# Altium PCB ADS1234.PcbDoc
Units mm, origin at the board's own origin, x right, y up, seen from the top; angles counter-clockwise.
Board outline 30 x 38 mm, 2 copper layers (Top Layer, Bottom Layer); 23 components, 29 nets, 87 pads, 10 vias.
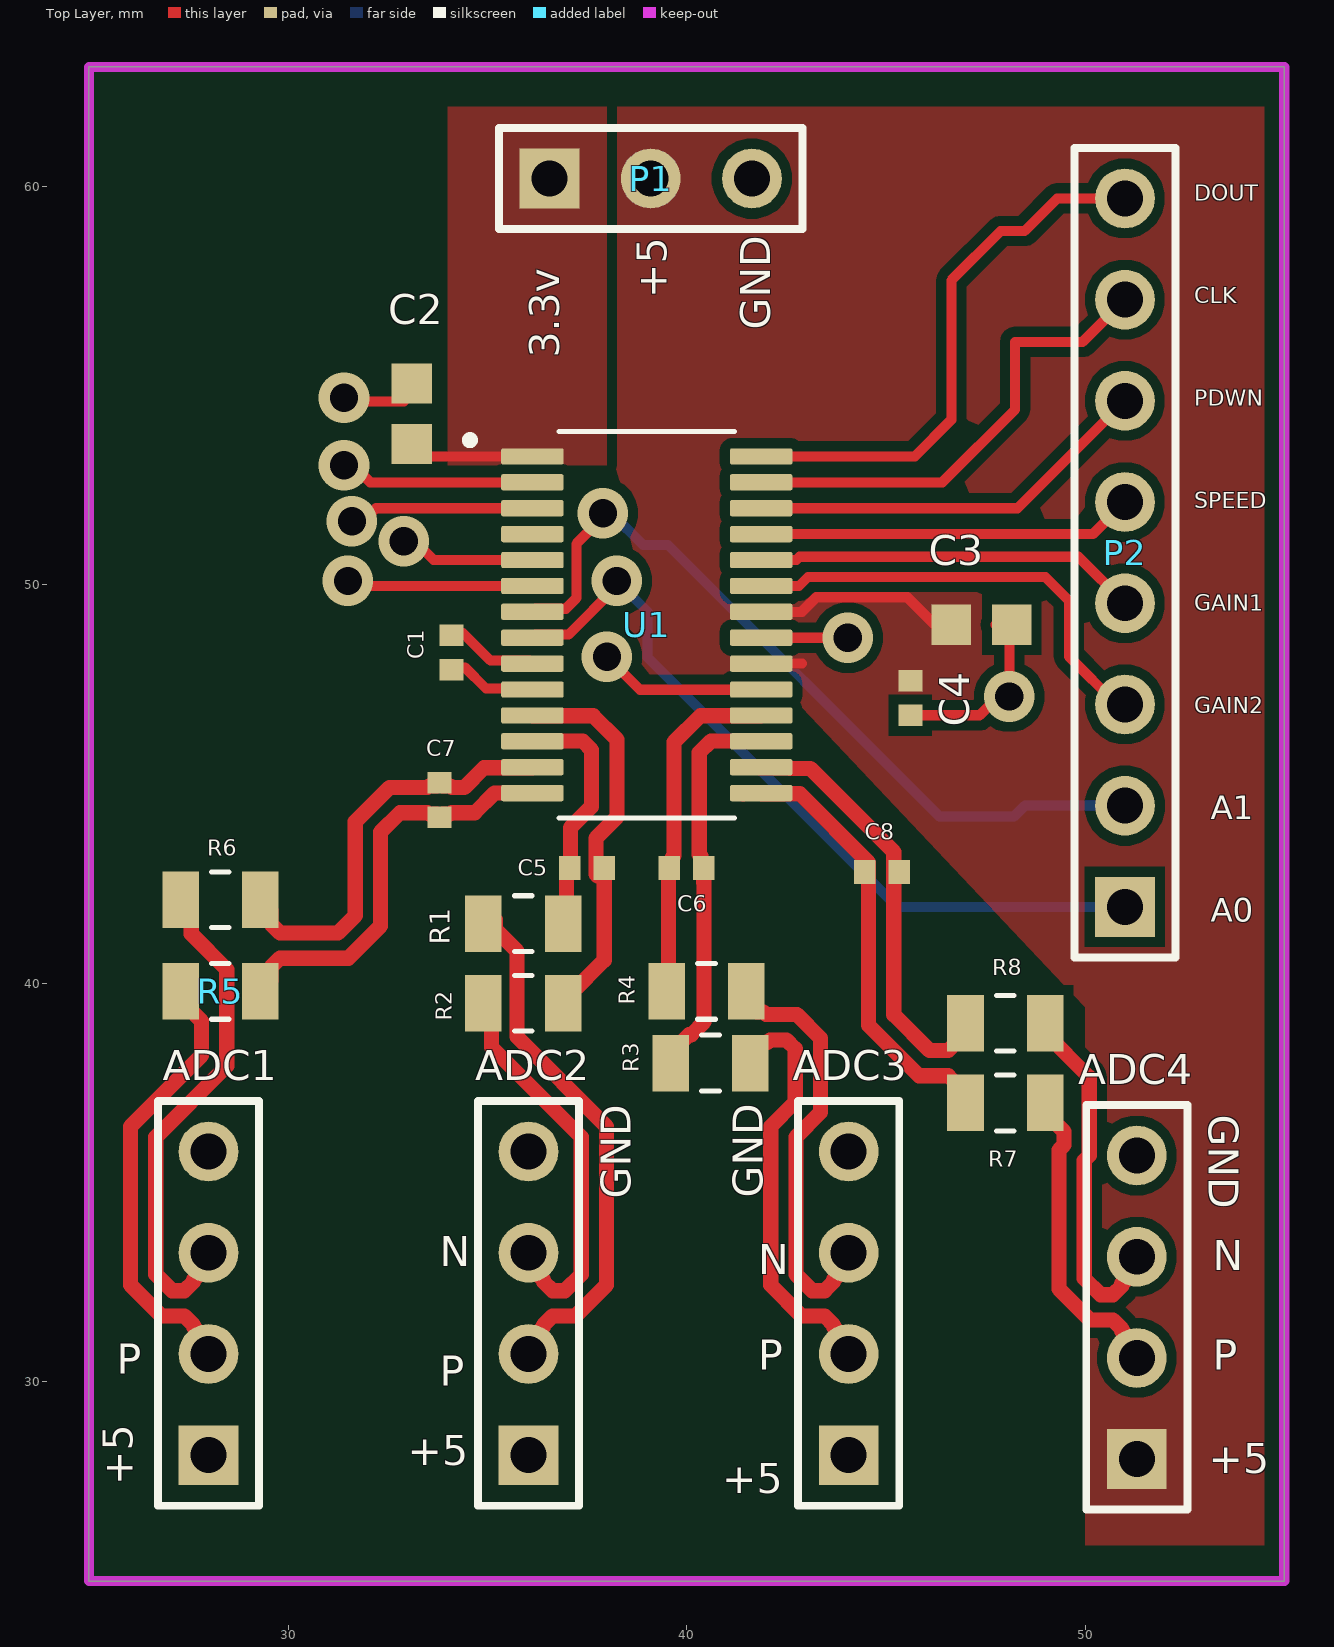
[diagram p0: Top Layer view]
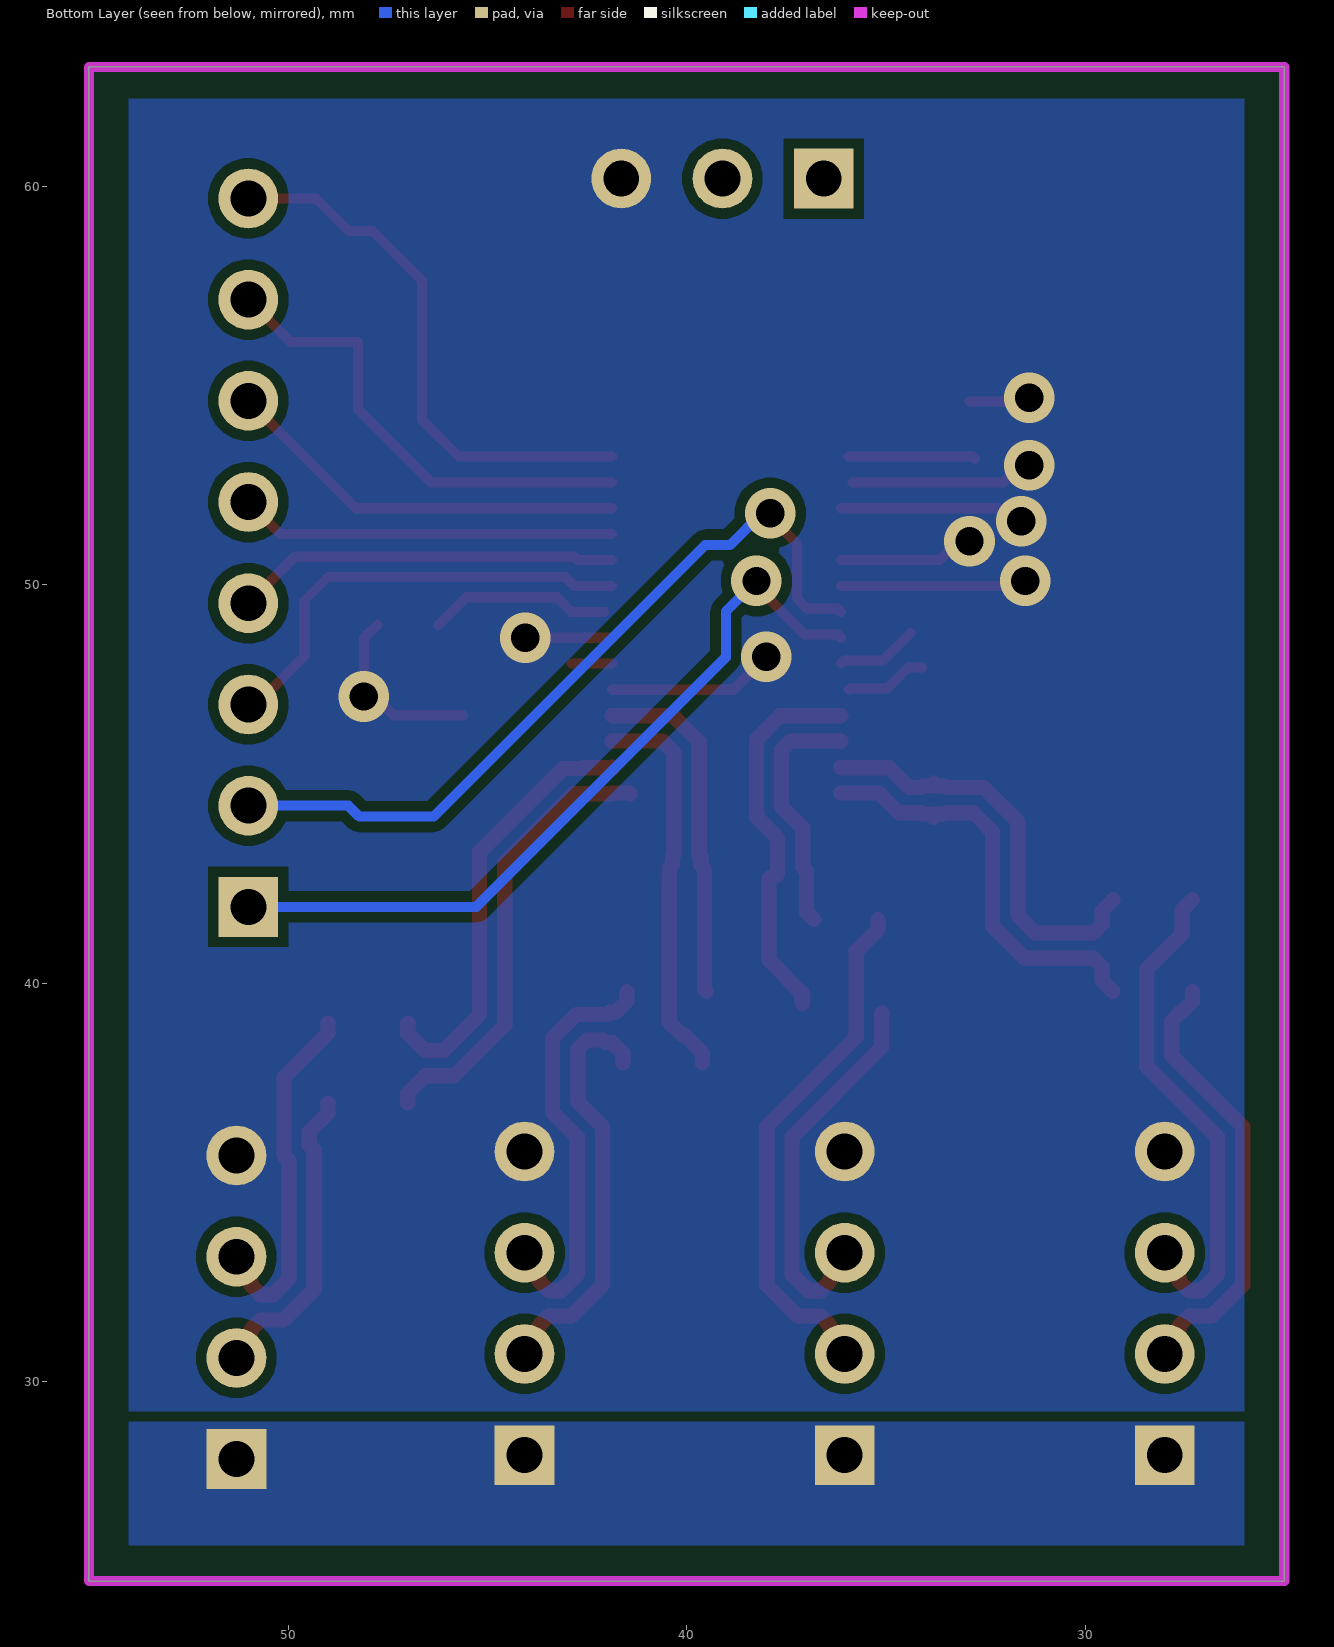
[diagram p1: Bottom Layer view, seen from below]
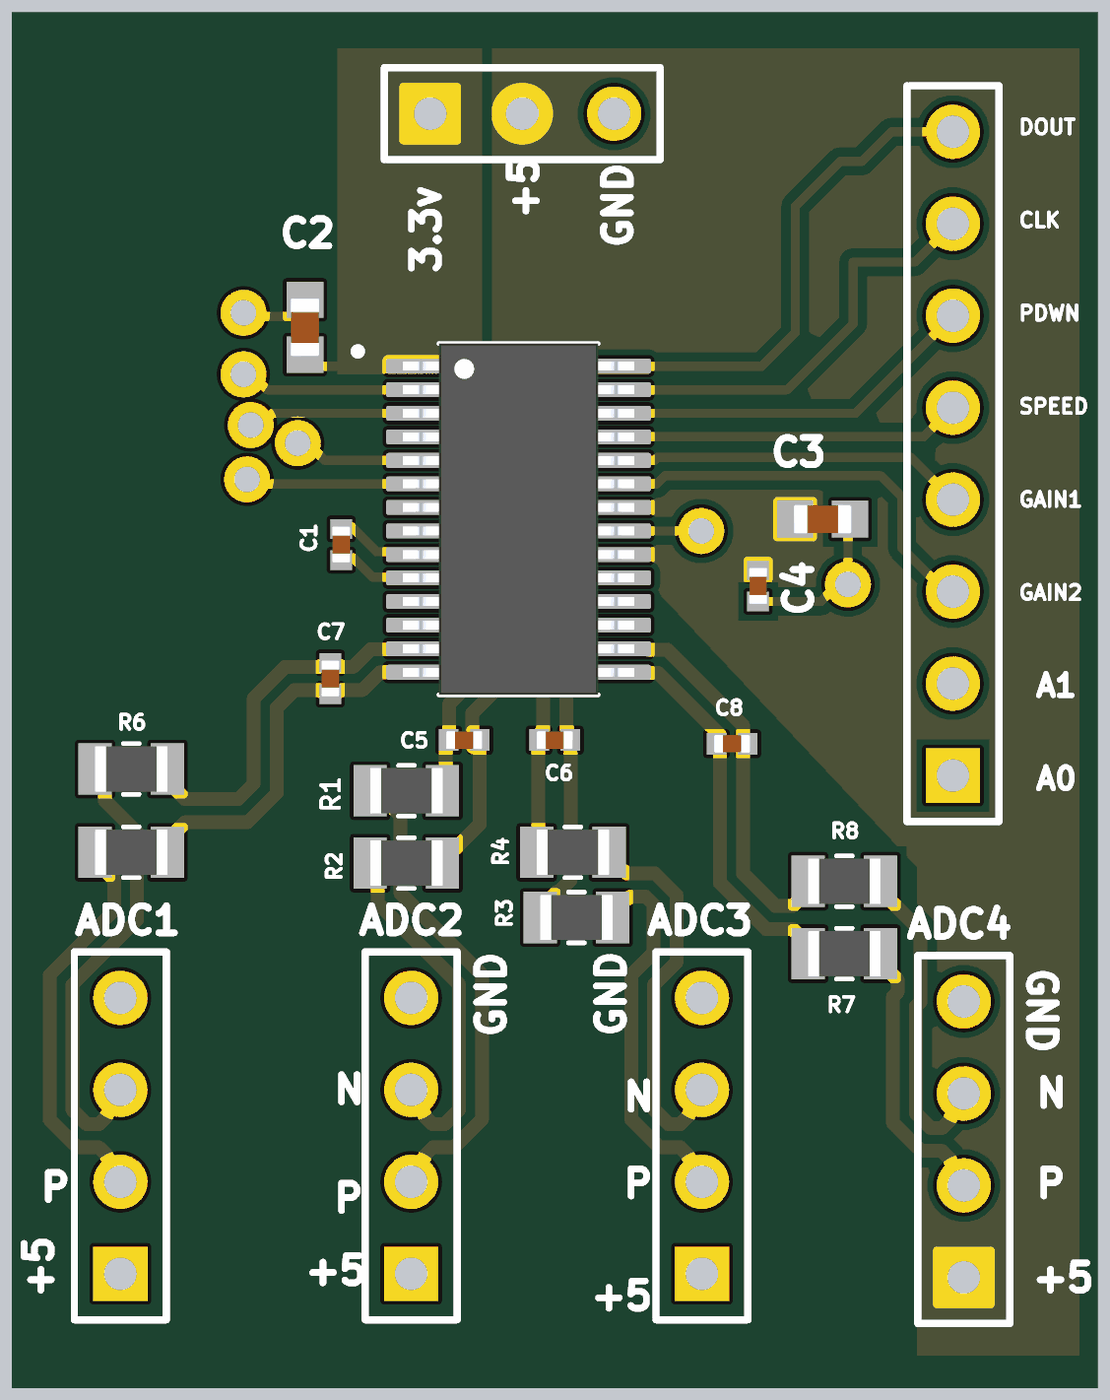
[diagram p2: 3D render of the assembled board from above, using the file's embedded part models]

## Layer stack, top to bottom
Top Solder: solder mask 0.0102, Solder Resist, Dk 3.5
Top Layer: signal copper 0.0356
Dielectric 1: dielectric 0.32, FR-4, Dk 4.8
Bottom Layer: signal copper 0.0356
Bottom Solder: solder mask 0.0102, Solder Resist, Dk 3.5

## Board outline
25,25 55,25 55,63 25,63

## Design rules (kind name [scope] priority, off if disabled: settings)
Clearance [All] p1: gap=0.254 ignorepadtopadclearanceinfootprint=FALSE except(0: Arc-Hole Track-Hole SMDPad-Hole THPad-Hole Via-Hole Fill-Hole Poly-Hole Region-Hole Text-Hole; 0.19: Arc-SMDPad Track-SMDPad SMDPad-SMDPad)
DiffPairsRouting [All] p1: maxlimit=0.254 minlimit=0.254 mostfreqgap=0.254 toplayer_minwidth=0.381 toplayer_maxwidth=0.381 toplayer_prefwidth=0.381 bottomlayer_minwidth=0.381 bottomlayer_maxwidth=0.381 bottomlayer_prefwidth=0.381 maxuncoupledlength=12.7
MinimumSolderMaskSliver [All] p1: minsoldermaskwidth=0.03
PlaneConnect [All] p1: planeconnectstyle=Direct reliefexpansion=0.508 reliefentries=4 reliefconductorwidth=0.254 reliefairgap=0.254
PolygonConnect [All] p1: connectstyle=Direct reliefconductorwidth=0.254 reliefentries=4 polygonreliefangle="90 Angle" airgapwidth=0.254
RoutingVias [All] p1: holewidth=0.711 width=1.27 viastyle="Through Hole" minholewidth=0.711 minwidth=1.27 maxholewidth=0.711 maxwidth=1.27
SilkToSolderMaskClearance [IsPad] p1: minsilkscreentomaskgap=0.256 clearancetoexposedcopper=TRUE
SolderMaskExpansion [All] p1: expansion=0.102 istentingtop=FALSE
Width [All] p1: maxlimit=0.254 minlimit=0.254 preferedwidth=0.254
26 further rules are at their usual default settings.

## Classes and differential pairs
differential pair A4: +A4_P -A4_N
differential pair A3: +A3_P -A3_N
differential pair A2: +A2_P -A2_N
differential pair A1: +A1_P -A1_N
differential pair AIN4: +AIN4_P -AIN4_N
differential pair AIN3: +AIN3_P -AIN3_N
differential pair AIN2: +AIN2_P -AIN2_N
differential pair AIN1: +AIN1_P -AIN1_N

## Components (designator, comment, footprint, x,y, rotation, side; value= is the part's Value field where it differs from the comment)
ADC1 "Header 4" HDR1X4 28,28.16 r90 top
ADC2 "Header 4" HDR1X4 36.033,28.16 r90 top
ADC3 "Header 4" HDR1X4 44.067,28.16 r90 top
ADC4 "Header 4" HDR1X4 51.3,28.06 r90 top
C1 "100N" CAPC1005X55N 34.1,48.3 r90 top
C2 "2.2uF" CAPC1608X100N 33.1,54.3 r90 top
C3 "2.2uF" CAPC1608X100N 47.4,49 r0 top
C4 "100N" CAPC1005X55N 45.617,47.16 r270 top
C5 "100N" CAPC1005X55N 37.5,42.9 r0 top
C6 "100N" CAPC1005X55N 40,42.9 r180 top
C7 "100N" CAPC1005X55N 33.8,44.6 r90 top
C8 "100N" CAPC1005X55N 44.9,42.8 r0 top
P1 "Power Input Header" HDR1X3 36.56,60.2 r0 top
P2 "DATA/CONTROL HEADER" HDR1X8 51,41.92 r90 top
R1 "1K" RESC2012X50N 35.9,41.5 r0 top
R2 "1K" RESC2012X50N 35.9,39.5 r0 top
R3 "1K" RESC2012X50N 40.6,38 r180 top
R4 "1K" RESC2012X50N 40.5,39.8 r180 top
R5 "1K" RESC2012X50N 28.3,39.8 r0 top
R6 "1K" RESC2012X50N 28.3,42.1 r0 top
R7 "1K" RESC2012X50N 48,37 r180 top
R8 "1K" RESC2012X50N 48,39 r180 top
U1 "ADS1234IPWR" SOP65P640X120-28N 39,49 r0 top

## Footprints (in the part's own frame and the unit in brackets; to place one, negate y for a bottom-side part, rotate by r counter-clockwise, add the part's x,y. Pads: shape width x height; smd on the part's side, far side on the other; paste and mask are expansions set on the pad)
CAPC1005X55N [mm]
  rect 0.54x0.6 smd: 1(-0.432,0) 2(0.432,0)
  body extent -0.5,-0.25 0.5,0.25, height 0.55
CAPC1608X100N [mm]
  rect 1x1.02 smd: 1(-0.759,0) 2(0.759,0)
  body extent -0.8,-0.4 0.8,0.4, height 1
HDR1X3 [mm] "Connector; Header; 3 Position"
  rect 1.5x1.5 hole 0.9: 1(0,0)
  round 1.5 hole 0.9: 2(2.54,0) 3(5.08,0)
  silkscreen extent -1.27,-1.27 6.35,1.27
HDR1X4 [mm] "Connector; Header; 4 Position"
  rect 1.5x1.5 hole 0.9: 1(0,0)
  round 1.5 hole 0.9: 2(2.54,0) 3(5.08,0) 4(7.62,0)
  silkscreen extent -1.27,-1.27 8.89,1.27
HDR1X8 [mm] "Connector; Header; 8 Position"
  rect 1.5x1.5 hole 0.9: 1(0,0)
  round 1.5 hole 0.9: 2(2.54,0) 3(5.08,0) 4(7.62,0) 5(10.16,0) 6(12.7,0) 7(15.24,0) 8(17.78,0)
  silkscreen extent -1.27,-1.27 19.05,1.27
RESC2012X50N [mm]
  rect 0.92x1.42 smd: 1(-1,0) 2(1,0)
  silkscreen extent -0.22,-0.7 0.22,0.7, body extent -1,-0.62 1,0.63, height 0.5
SOP65P640X120-28N [mm]
  rrect25% 1.57x0.41 smd: 1(-2.87,4.225) 2(-2.87,3.575) 3(-2.87,2.925) 4(-2.87,2.275) 5(-2.87,1.625) 6(-2.87,0.975) 7(-2.87,0.325) 8(-2.87,-0.325) 9(-2.87,-0.975) 10(-2.87,-1.625) 11(-2.87,-2.275) 12(-2.87,-2.925) 13(-2.87,-3.575) 14(-2.87,-4.225) 15(2.87,-4.225) 16(2.87,-3.575) 17(2.87,-2.925) 18(2.87,-2.275) 19(2.87,-1.625) 20(2.87,-0.975) 21(2.87,-0.325) 22(2.87,0.325) 23(2.87,0.975) 24(2.87,1.625) 25(2.87,2.275) 26(2.87,2.925) 27(2.87,3.575) 28(2.87,4.225)
  silkscreen extent -4.54,-4.85 2.2,4.85, body extent -3.2,-4.85 3.2,4.85, height 1.2

## Part data
ADC1 ADC2 ADC3 ADC4: "Header, 4-Pin", LatestRevisionDate=17-Jul-2002, LatestRevisionNote="Re-released for DXP Platform.", Publisher="Altium Limited"
C1 C4 C5 C6 C7 C8: library part GRM155R71C104KA88D, "SMD Capacitor X7R_EIA_ with Capacitance: 0.10uF Tol. 10%. Rated Voltage: 16Vdc", Package="1005 Taiyo Yuden", MF=Murata, MP=GRM155R71C104KA88D, SnapEDA_Link=https://www.snapeda.com/parts/GRM155R71C104KA88D/Murata%20Electronics%20North%20America/view-part/4750/?ref=snap
C2 C3: library part GRM188R61H225ME11D, Package=None, Availability=Unavailable, MP=GRM188R61H225ME11D, Price=None
P1: library part "Header 3", "Header, 3-Pin", LatestRevisionDate=17-Jul-2002, LatestRevisionNote="Re-released for DXP Platform.", Publisher="Altium Limited"
P2: library part "Header 8", "Header, 8-Pin", LatestRevisionDate=17-Jul-2002, LatestRevisionNote="Re-released for DXP Platform.", Publisher="Altium Limited"
R1 R2 R3 R4 R5 R6 R7 R8: library part CRCW08051K00DHEAP, Package=None, Availability=Unavailable, MP=CRCW08051K00DHEAP, Price=None
U1: Package=None, Availability=Unavailable, MP=ADS1234IPWR, Price=None

## Via types
v1: diameter 1.27, hole 0.711, Top Layer to Bottom Layer, 10 vias

## Nets (pads, with @x,y where several pads share a name; then routed paths per layer and width w, separated by ;. In a path a pad name is that pad's centre, name@x,y a point inside that pad or via, vN(x,y) a via of type N, cw(c..) or ccw(c..) an arc to the next point about the centre after c; other vN are vias at no path point)
3.3V: C2.1 P1.1 U1.1 | length 3.2
  Top Layer w0.254: C2.1@32.759,53.168 32.816,53.225 U1.1@35.936,53.225
5V: ADC1.1 ADC2.1 ADC3.1 ADC4.1 C3.1 C4.1 P1.2 U1.20 U1.22 | length 5.6
  Top Layer w0.254: U1.20 42.89,48.025 ; U1.22@42.064,49.325 42.888,49.325 43.255,49.692 45.539,49.692 C3.1@46.241,48.99
A0: P2.1 U1.8 | length 19.6
  Top Layer w0.254: U1.8 36.208,48.753 37.035,48.753 38.248,49.966 v1(38.248,50.1)
  Bottom Layer w0.254: v1(38.248,50.1) 39.016,49.332 39.016,48.184 45.28,41.92 P2.1
A1: P2.2 U1.7 | length 20
  Top Layer w0.254: U1.7 36.208,49.403 36.966,49.403 37.232,49.669 37.232,50.319 37.232,51.031 37.9,51.699 v1(37.9,51.8)
  Bottom Layer w0.254: v1(37.9,51.8) 38.111,51.8 38.908,51.003 39.534,51.003 46.353,44.184 48.214,44.184 48.49,44.46 P2.2
A1_N: C5.1 R1.2 U1.12 | length 6.2
  Top Layer w0.381: U1.12 36.137,46.082 37.392,46.082 37.615,45.859 37.615,44.435 37.087,43.908 37.087,42.919 C5.1 36.989,42.821 36.989,41.789 R1.2@36.8,41.6
A1_P: C5.2 R2.2 U1.11 | length 9.5
  Top Layer w0.381: U1.11 36.137,46.717 37.655,46.717 38.25,46.122 38.25,44.172 37.722,43.644 37.722,42.738 C5.2@37.763,42.697 ; R2.2@37.1,39.5 37.1,39.75 37.932,40.582 C5.2@37.932,42.637
A2_N: C6.1 R3.2 U1.17 | length 9.9
  Top Layer w0.381: R3.2 39.6,38.25 40.059,38.709 40.118,38.709 40.438,39.03 40.438,42.527 40.432,42.533 C6.1 40.352,42.98 40.352,43.2 40.317,43.235 40.317,45.792 40.608,46.082 41.862,46.082 U1.17
A2_P: C6.2 R4.2 U1.18 | length 8.7
  Top Layer w0.381: R4.2 39.547,39.847 C6.2@39.547,42.821 ; C6.2 39.647,42.98 39.647,43.168 39.682,43.204 39.682,46.055 40.345,46.717 41.862,46.717 U1.18
A3_N: C7.1 R5.2 U1.14 | length 10.6
  Top Layer w0.381: R5.2 29.57,40.07 29.57,40.409 29.793,40.632 31.516,40.632 32.32,41.437 32.32,43.796 32.806,44.282 33.497,44.282 33.532,44.247 33.721,44.247 C7.1 33.88,44.247 34.068,44.247 34.104,44.282 34.684,44.282 35.177,44.775 U1.14
A3_P: C7.2 R6.2 U1.13 | length 10.6
  Top Layer w0.381: R6.2 29.57,41.83 29.57,41.491 29.793,41.267 31.253,41.267 31.685,41.7 31.685,43.81 31.685,44.059 32.543,44.917 33.497,44.917 33.532,44.953 33.721,44.953 C7.2 33.88,44.953 34.068,44.953 34.104,44.917 34.421,44.917 34.914,45.41 36.115,45.41 U1.13
A4_N: C8.1 R7.2 U1.15 | length 11.3
  Top Layer w0.381: U1.15@41.422,44.76 41.437,44.775 U1.15 41.884,44.76 42.841,44.76 44.565,43.037 44.565,38.95 45.832,37.683 46.567,37.683 47,37.25 R7.2
A4_P: C8.2 R8.2 U1.16 | length 10.9
  Top Layer w0.381: U1.16@41.855,45.41 U1.16 41.884,45.41 42.575,45.41 42.59,45.395 43.105,45.395 45.2,43.3 45.2,39.213 46.095,38.318 46.567,38.318 47,38.75 R8.2
AIN1_N: ADC2.3 R2.1 | length 9.6
  Top Layer w0.381: R2.1@35.1,39.25 35.106,39.244 35.106,38.397 37.355,36.148 37.355,32.693 36.95,32.287 36.634,32.287 36.411,32.511 36.411,32.56 36.033,32.937 ADC2.3
AIN1_P: ADC2.2 R1.1 | length 13.2
  Top Layer w0.381: R1.1@35.2,41.6 35.2,41.35 35.741,40.81 35.741,38.66 37.99,36.411 37.99,32.43 37.213,31.652 36.634,31.652 36.411,31.429 36.411,31.38 36.033,31.003 ADC2.2
AIN2_N: ADC3.3 R4.1 | length 10.9
  Top Layer w0.381: R4.1 41.5,39.55 41.77,39.28 41.93,39.28 41.993,39.218 42.768,39.218 43.363,38.622 43.363,36.765 42.745,36.148 42.745,32.693 43.15,32.287 43.466,32.287 43.689,32.511 43.689,32.56 44.067,32.937 ADC3.3 ADC3.3@44.067,33.375
AIN2_P: ADC3.2 R3.1 | length 10.7
  Top Layer w0.381: R3.1 41.6,38.25 41.87,38.52 42.03,38.52 42.093,38.583 42.505,38.583 42.728,38.359 42.728,37.028 42.11,36.411 42.11,32.43 42.887,31.652 43.466,31.652 43.689,31.429 43.689,31.38 44.067,31.003 ADC3.2
AIN3_N: ADC1.3 R6.1 | length 12.7
  Top Layer w0.381: R6.1 27.57,41.83 27.57,41.239 28.459,40.349 28.459,37.929 26.678,36.148 26.678,32.693 27.084,32.287 27.399,32.287 27.622,32.511 27.622,32.56 28,32.937 ADC1.3
AIN3_P: ADC1.2 R5.1 | length 11.2
  Top Layer w0.381: R5.1 27.3,39.55 27.57,39.281 27.601,39.281 27.824,39.057 27.824,38.192 26.043,36.411 26.043,32.43 26.821,31.652 27.399,31.652 27.622,31.429 27.622,31.38 28,31.003 ADC1.2
AIN4_N: ADC4.3 R8.1 | length 9
  Top Layer w0.381: R8.1 49,38.75 50.105,37.645 50.105,35.679 49.978,35.552 49.978,32.593 50.384,32.187 50.699,32.187 50.922,32.411 50.922,32.46 51.3,32.837 ADC4.3
AIN4_P: ADC4.2 R7.1 | length 8
  Top Layer w0.381: R7.1 49,36.75 49.47,36.28 49.47,35.942 49.343,35.815 49.343,32.33 50.121,31.552 50.699,31.552 50.922,31.329 50.922,31.28 51.3,30.903 ADC4.2 ADC4.2@51.102,30.6
GAIN0: P2.3 U1.23 | length 11.4
  Top Layer w0.254: U1.23 42.82,49.975 43.045,50.2 49,50.2 49.592,49.608 49.592,48.208 50.8,47 P2.3
GAIN1: P2.4 U1.24 | length 9.6
  Top Layer w0.254: U1.24 42.751,50.625 42.834,50.708 49.832,50.708 P2.4
GND: ADC1.4 ADC2.4 ADC3.4 ADC4.4 C2.2 C3.2 C4.2 P1.3 U1.2 U1.3 U1.5 U1.6 U1.19 U1.21 | length 29.9
  Top Layer w0.254: v1@31.397,54.697 31.494,54.6 C2.2@32.9,54.6 ; v1(31.4,53) 31.632,53 32.057,52.575 U1.2@35.84,52.575 ; v1(31.5,50.1) 31.625,49.975 U1.6 ; v1(31.6,51.6) 31.875,51.6 32.2,51.925 U1.3 ; v1(32.9,51.1) 33.175,51.1 33.65,50.625 U1.5 ; v1(38,48.2) 38.831,47.369 41.864,47.369 U1.19 ; U1.21 v1(44.047,48.675) ; C4.2 47.353,46.728 47.825,47.2 v1(48.1,47.2) 48.1,48.659 C3.2@47.759,49
  other v1: 31.4,54.7
NetC1_1: C1.1 U1.10 | length 2.1
  Top Layer w0.254: C1.1@34.1,47.932 34.433,47.932 34.964,47.401 35.91,47.401 U1.10@35.936,47.375
NetC1_2: C1.2 U1.9 | length 2.1
  Top Layer w0.254: C1.2@34.381,48.796 35.074,48.103 36.052,48.103 U1.9
PDWN: P2.6 U1.26 | length 10.2
  Top Layer w0.254: U1.26 48.305,51.925 P2.6
SCLK: P2.7 U1.27 | length 12.3
  Top Layer w0.254: U1.27 46.415,52.575 48.245,54.405 48.245,56.1 49.94,56.1 P2.7 P2.7@51.279,57.16
SDA: P2.8 U1.28 | length 13.9
  Top Layer w0.254: U1.28 45.725,53.225 46.645,54.145 46.645,57.6 46.645,57.645 47.883,58.883 48.483,58.883 49.3,59.7 P2.8
SPEED: P2.5 U1.25 | length 9.5
  Top Layer w0.254: U1.25 50.195,51.275 P2.5
pads on no net: U1.4

## Polygon pours and split planes (outlines as drawn)
GND on Bottom Layer "NONET_L01_P-001" (solid, pour order 1): 26,62.2 26,26 54,26 54,62.2
5V on Bottom Layer "NONET_L01_P-001" (solid, pour order 0): 26,29 26,25.9 54,25.9 54,29
5V on Top Layer "NONET_L01_P-001" (solid, pour order 4): 40,50 50,39.4 50,25.9 54.5,25.9 54.5,50
5V on Top Layer "NONET_L01_P-001" (solid, pour order 3): 38,62 38,47 54.5,47 54.5,62
3.3V on Top Layer "NONET_L01_P-001" (solid, pour order 2): 38,62 38,53 34,53 34,62

## Keep-outs
Keep-Out Layer:
  the board outline again, w0.254

## Silkscreen, mask and mechanical layers (free items; w line width, h text height)
Top Overlay:
  text "DOUT" at 52.74,59.64 h0.4
  text "+5" at 39.5,57.2 h0.75 r90
  text "CLK" at 52.74,57.069 h0.4
  text "GND" at 42.1,56.4 h0.75 r90
  text "3.3v" at 36.8,55.7 h0.75 r90
  text "PDWN" at 52.74,54.497 h0.4
  text "SPEED" at 52.74,51.926 h0.4
  text "GAIN1" at 52.74,49.354 h0.4
  text "GAIN2" at 52.74,46.783 h0.4
  text "A1" at 53.15,44.121 h0.6
  text "A0" at 53.15,41.55 h0.6
  text "GND" at 53.1,36.7 h0.75 r270
  text "GND" at 41.91,34.62 h0.75 r90
  text "GND" at 38.6,34.6 h0.75 r90
  text "N" at 33.8,32.9 h0.75
  text "N" at 53.2,32.8 h0.75
  text "N" at 41.8,32.7 h0.75
  text "P" at 41.8,30.3 h0.75
  text "P" at 53.2,30.3 h0.75
  text "P" at 25.7,30.2 h0.75
  text "P" at 33.8,29.9 h0.75
  text "+5" at 33,27.9 h0.75
  text "+5" at 53.1,27.7 h0.75
  text "+5" at 26.1,27.4 h0.75 r90
  text "+5" at 40.9,27.2 h0.75